# EAGLE board LTC3105_DoubleCharger_50x42mm (EAGLE 7.2.0)
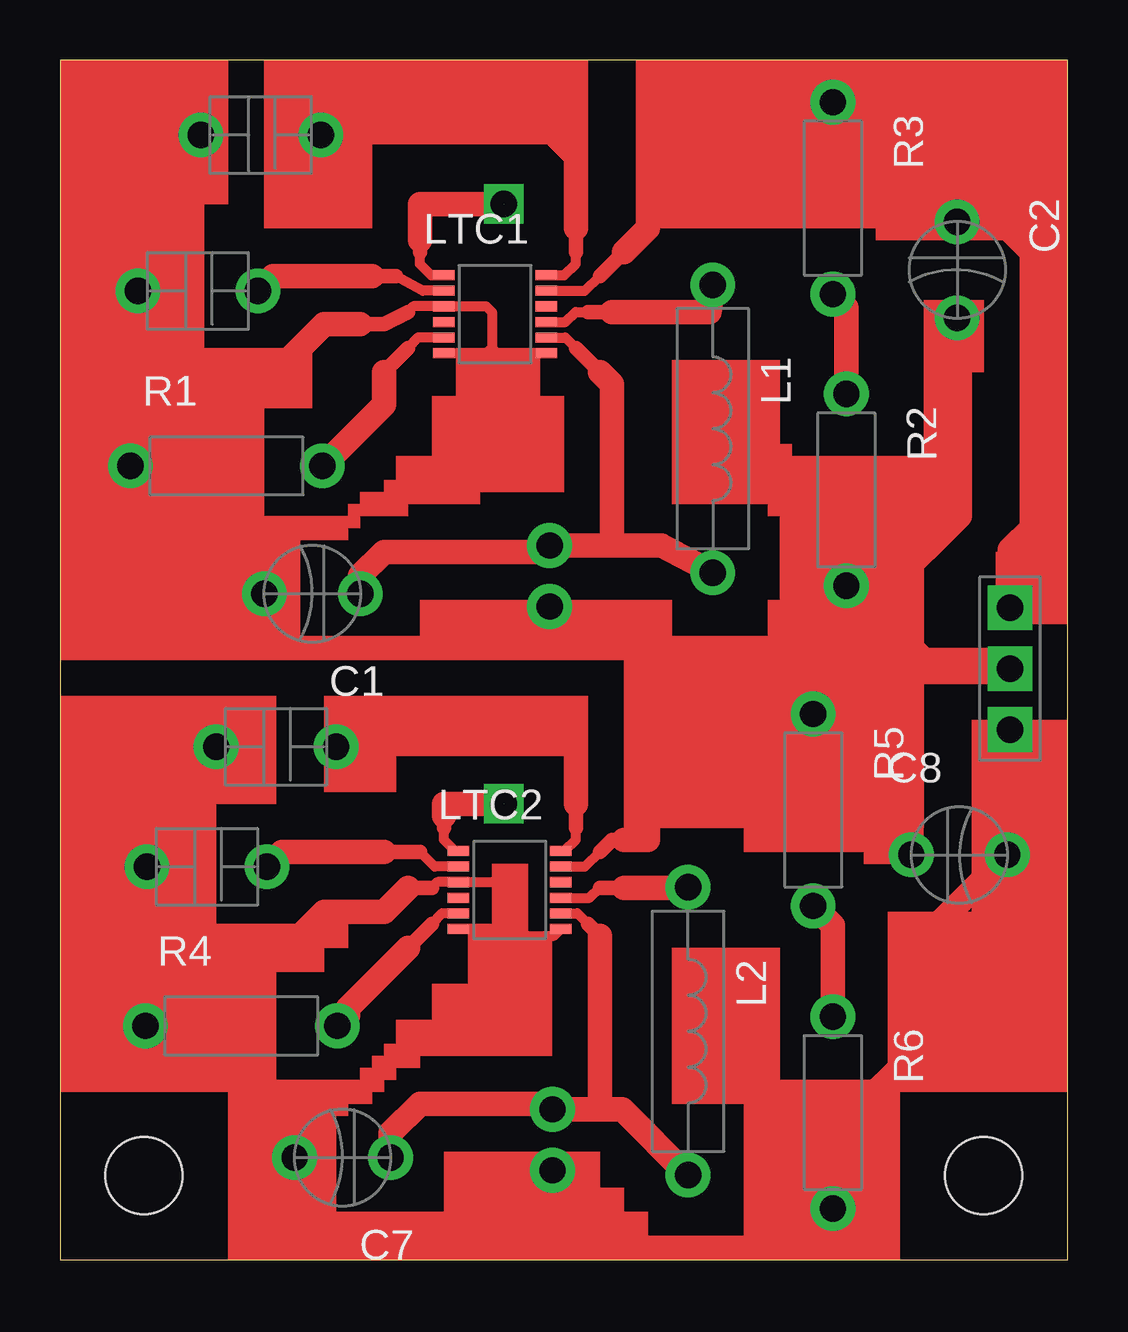
[diagram p0: board, top side]
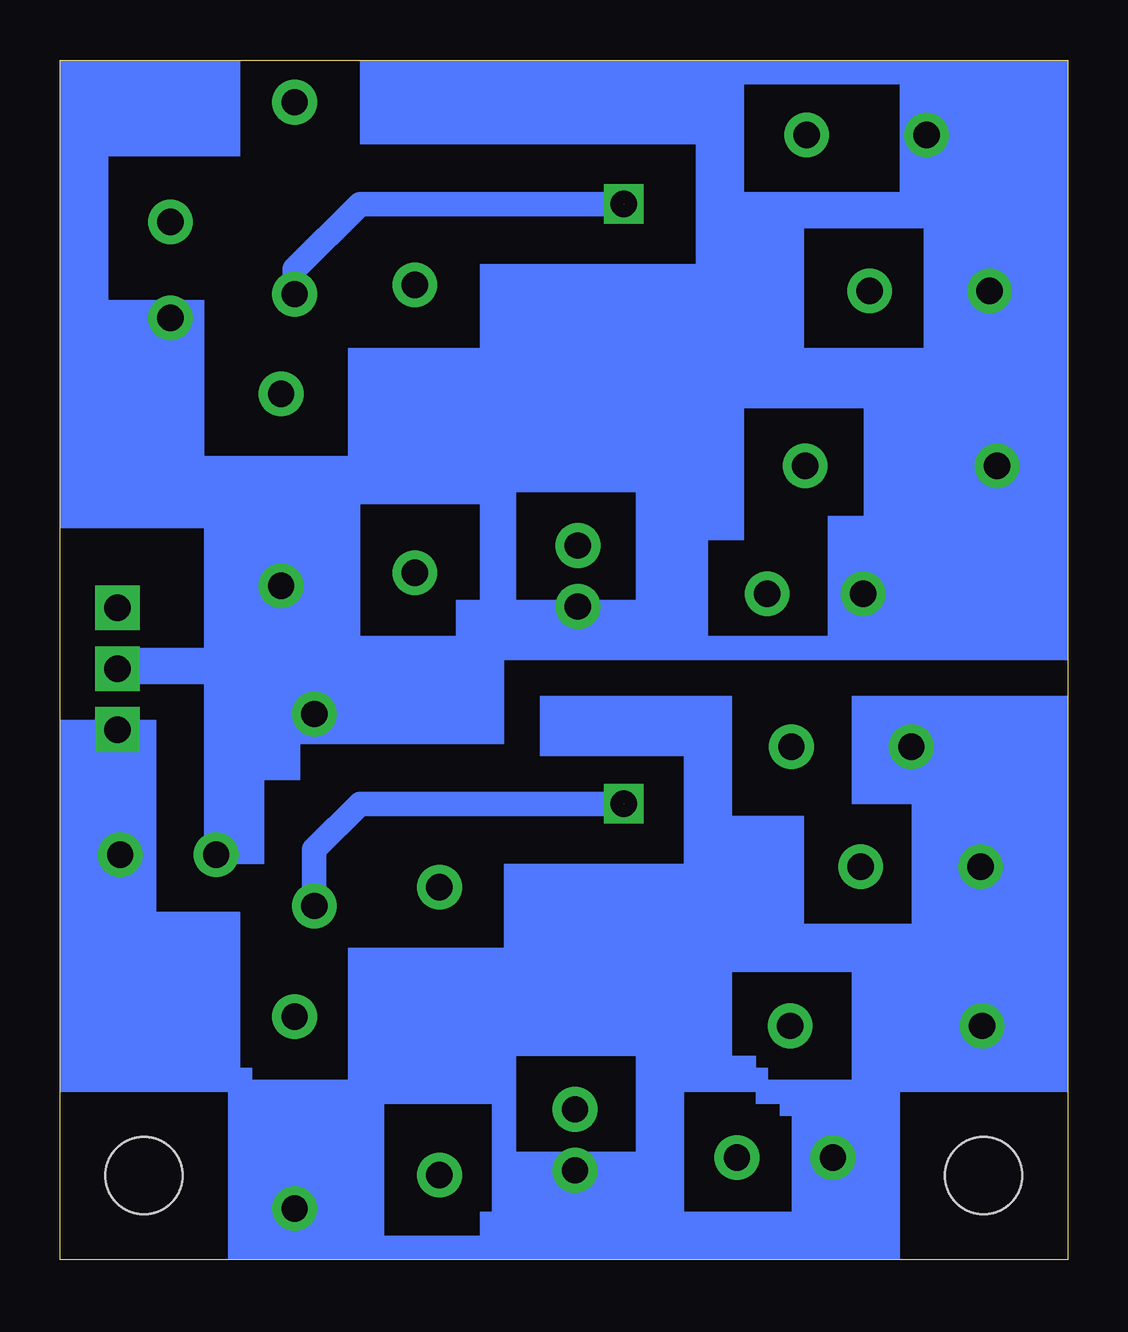
[diagram p1: board, bottom side, seen from below]

Size 42 x 50 mm. Coordinates in mm from the lower left corner, seen from the top.
Outline: 0,0 42,0 42,50 0,50 0,0
Copper layers (1*16): Top 0.035mm / dielectric 1.5mm / Bottom 0.035mm
Design rules "default *": minimum track width 10mil, minimum drill 24mil, track to track 15mil, track to pad 15mil, pad to pad 15mil, via to via 15mil, smd to smd 8mil, copper to edge 40mil, drill to drill 8mil, minimum pad ring 15mil, minimum via ring 8mil, stop-mask expansion 4mil, vias tented up to drill 0mil, thermal gap 10mil
Holes 3.2 mm at 3.5,3.5 38.5,3.5

## Footprints (pad centres in the part's own frame; a part is rotated, then mirrored left to right if it is on the bottom)
C_ELT_2MM = drill 1.1: + -2,0; - 2,0
C_CER_5MM = drill 1.1: IN -2.5,0; OUT 2.5,0
L_10X3 = drill 1.1: X1 -6,0; X2 6,0
LTC3105 = smd 0.89 x 0.42: AUX 3.82,1.95; FB -0.45,1.95; FBLDO -0.45,0.65; GND1 -0.45,-1.3; GND2 3.82,-1.3; LDO -0.45,1.3; MPPC -0.45,-0.65; PGOOD 3.82,0.65; SHDN -0.45,0; SW 3.82,0; VIN 3.82,-0.65; VOUT 3.82,1.3
R_6X2 = drill 1.1: X1 -4,0; X2 4,0
BAT3_PLUG = drill 1.1 square: GND 0,-2.54; V1 0,0; V2 0,2.54
BAT_PLUG = drill 1.1: GND 0,0; VBAT 0,2.54

## Placement (x,y rotation side)
C1  10uF  [C_ELT_2MM]  10.52,27.75 180 top
C2  10uF  [C_ELT_2MM]  37.4,41.25 270 top
C3  1uF  [C_CER_5MM]  8.37,46.87 180 top
C4  4.7 uF  [C_CER_5MM]  5.75,40.37 180 top
C5  4.7 uF  [C_CER_5MM]  6.13,16.37 180 top
C6  1uF  [C_CER_5MM]  9.01,21.37 180 top
C7  10uF  [C_ELT_2MM]  11.78,4.25 180 top
C8  10uF  [C_ELT_2MM]  37.49,16.87 0 top
L1  10uH  [L_10X3]  27.21,34.63 270 top
L2  10uH  [L_10X3]  26.18,9.52 270 top
LTC1  LTC3105  [LTC3105]  16.45,39.08 0 top
LTC2  LTC3105  [LTC3105]  17.06,15.08 0 top
R1  39k  [R_6X2]  6.94,33.08 0 top
R2  330k  [R_6X2]  32.78,32.08 270 top
R3  1.1M  [R_6X2]  32.22,44.24 270 top
R4  39k  [R_6X2]  7.56,9.74 0 top
R5  1.1M  [R_6X2]  31.4,18.74 270 top
R6  330k  [R_6X2]  32.22,6.13 270 top
U$1  BAT3_PLUG  [BAT3_PLUG]  39.6,24.63 0 top
U$3  BAT_PLUG  [BAT_PLUG]  20.53,3.72 0 top
U$10  BAT_PLUG  [BAT_PLUG]  20.41,27.22 0 top

## Library data of the parts
C1-C8 L1 L2 LTC1 LTC2 R1-R6 U$1 U$3 U$10 = MyDuino

## Nets
LTC1: LTC1.FB R2.X1 R3.X2
N$1: LTC1.MPPC R1.X2
N$2: C4.IN LTC1.LDO
N$4: C3.IN LTC1.AUX
N$5: L1.X1 LTC1.SW
N$6: LTC2.MPPC R4.X2
N$7: C2.+ LTC1.VOUT R3.X1 U$1.V2
N$8: C5.IN LTC2.LDO
N$9: C5.OUT C6.OUT C7.- C8.- LTC2.FBLDO LTC2.GND1 LTC2.GND2 R4.X1 R6.X2 U$1.GND U$3.GND
N$10: C1.+ L1.X2 LTC1.VIN U$10.VBAT
N$11: C7.+ L2.X2 LTC2.VIN U$3.VBAT
N$12: L2.X1 LTC2.SW
N$13: C6.IN LTC2.AUX
N$14: C1.- C2.- C3.OUT C4.OUT C8.+ LTC1.FBLDO LTC1.GND1 LTC1.GND2 LTC2.VOUT R1.X1 R2.X2 R5.X1 U$1.V1 U$10.GND
N$15: LTC2.FB R5.X2 R6.X1

## Tracks (layer width: path | path; a pad name or v marks a point on that pad's centre or on a via)
LTC1  (1 unrouted)
  Top 0.406: LTC1.FB 15.47,41.03 15,41.5 15,42
  Top 0.61: 15,42 15,42.5
  Top 1.016: R2.X1 32.78,39.68 R3.X2 | 15,42.5 15,44 18.5,44
  Bottom 1.016: R3.X2 32.22,41.28 29.5,44 18.5,44
N$1
  Top 0.406: LTC1.MPPC 14.93,38.43 14.5,38
  Top 0.61: 14.5,38 13.5,37
  Top 1.016: 13.5,37 13.5,35.64 R1.X2
N$2
  Top 0.406: LTC1.LDO 15.12,40.38 14,41
  Top 0.61: 14,41 13,41
  Top 1.016: 13,41 8.88,41 C4.IN
N$3  (via drill 1.1)
  other vias: 18.5,44
N$4
  Top 0.406: LTC1.AUX 21.03,41.03 21.5,41.5 21.5,42
  Top 0.61: 21.5,42 21.5,43
  Top 1.016: 21.5,43 21.5,46 20.5,47 11,47 C3.IN
N$5
  Top 0.406: LTC1.SW 21.08,39.08 21.5,39.5 22,39.5
  Top 0.61: 22,39.5 23,39.5
  Top 1.016: 23,39.5 27.08,39.5 L1.X1
N$6
  Top 0.406: LTC2.MPPC 15.93,14.43 15.5,14
  Top 0.61: 15.5,14 14.5,13
  Top 1.016: 14.5,13 12,10.5 12,10.18 R4.X2
N$7
  Top 0.406: LTC1.VOUT 21.88,40.38 22.5,41
  Top 0.61: 22.5,41 23.5,42
  Top 1.016: U$1.V2 39.6,29.6 40.5,30.5 40.5,42 39.5,43 37.65,43 C2.+ 37.5,43.35 37.5,46.5 35.76,48.24 R3.X1 31.98,48 26.5,48 24.5,46 24.5,43 23.5,42
N$8
  Top 0.406: LTC2.LDO 15.62,16.38 15,17
  Top 0.61: 15,17 13.5,17
  Top 1.016: 13.5,17 9.26,17 C5.IN
N$9
  Top 0.406: 15.5,15.5 15.73,15.73 LTC2.FBLDO 18.77,15.73 19,15.5 19,13.5 | 19,13.5 20.6,13.5 LTC2.GND2 | LTC2.GND1 18.72,13.78 19,13.5
  Top 0.61: 15.5,15.5 14.5,15.5
  Top 1.016: C6.OUT 4.87,21.37 3.5,20 3.5,16.5 C5.OUT 3.56,16.3 3.56,13.5 | 10,4.47 10,5 7,8 4.5,8 3.56,8.94 R4.X1 3.56,13.5 | 10,4.47 C7.- | 10,4.47 10,1 10.5,0.5 17.31,0.5 U$3.GND 20.53,3.47 23.5,0.5 30.59,0.5 R6.X2 32.22,5.22 36.5,9.5 36.5,13.88 C8.- 39.49,21.98 U$1.GND | 14.5,15.5 13.5,14.5 11,14.5 10,13.5 3.56,13.5
N$10
  Top 0.406: LTC1.VIN 21.07,38.43 21.5,38
  Top 0.61: 21.5,38 22.5,37
  Top 1.016: C1.+ 12.52,28.52 13.5,29.5 20.15,29.5 U$10.VBAT 23,29.76 | 23,29.76 25.08,29.76 L1.X2 | 22.5,37 23,36.5 23,29.76
N$11
  Top 0.406: LTC2.VIN 21.57,14.43 22,14
  Top 0.61: 22,14 22.5,13.5
  Top 1.016: C7.+ 13.78,5.28 15,6.5 20.29,6.5 U$3.VBAT 22.5,6.26 | 22.5,6.26 23.44,6.26 L2.X2 | 22.5,13.5 22.5,6.26
N$12
  Top 0.406: LTC2.SW 22.08,15.08 22.5,15.5
  Top 0.61: 22.5,15.5 23.5,15.5
  Top 1.016: 23.5,15.5 26.16,15.5 L2.X1
N$13
  Top 0.406: LTC2.AUX 21.03,17.03 21.5,17.5 21.5,18
  Top 0.61: 21.5,18 21.5,19
  Top 1.016: 21.5,19 21.5,21.5 11.64,21.5 C6.IN
N$14
  Top 0.406: 14.5,39.5 14.73,39.73 LTC1.FBLDO 17.77,39.73 18,39.5 18,38 | 18,38 18,37.5 | LTC1.GND2 18.22,37.78 18,38 | LTC1.GND1 17.78,37.78 18,38 | LTC2.VOUT 21.88,16.38 22.5,17
  Top 0.61: 14.5,39.5 13.5,39 12.5,39 | 22.5,17 23,17.5 23.5,17.5
  Top 1.016: C3.OUT 4.37,46.87 3.5,46 3.5,40.62 C4.OUT 3.25,37.5 | 3.25,37.5 3.25,37.25 3,37 3,33.14 | 3,33.14 R1.X1 | 3,33.14 3,30 5,28 8.27,28 C1.- 8.52,25.98 9,25.5 18.69,25.5 U$10.GND 20.78,27.22 22.5,25.5 24.5,25.5 | 24.5,25.5 28.64,25.5 R5.X1 | R5.X1 31.4,26.7 R2.X2 | R2.X2 32.92,28.08 36.5,24.5 39.47,24.5 U$1.V1 | R2.X2 34.58,28.08 37.5,31 37.5,39.15 C2.- | C8.+ 35.49,18.65 R5.X1 | 12.5,39 11,39 9.5,37.5 3.25,37.5 | 23.5,17.5 24.5,17.5 24.5,25.5
N$15  (1 unrouted)
  Top 0.406: LTC2.FB 16.47,17.03 16,17.5 16,18
  Top 0.61: 16,18 16,18.5
  Top 1.016: R6.X1 32.22,13.92 R5.X2 | 16,18.5 16,19 18.5,19
  Bottom 1.016: R5.X2 31.4,17.1 29.5,19 18.5,19
N$16  (via drill 1.1)
  other vias: 18.5,19
(copper drawn outside any net)
  shapes: Bottom area x62, Top area x78